# Altium PCB CellVoltageControl.PcbDoc (part 1 of 3)
Units mm, origin at the board's own origin, x right, y up, seen from the top; angles counter-clockwise.
Board outline 100.01 x 50.02 mm, 2 copper layers (Top Layer, Bottom Layer); 246 components, 111 nets, 654 pads, 146 vias.
Unrouted connection lines stored in the file: 464.
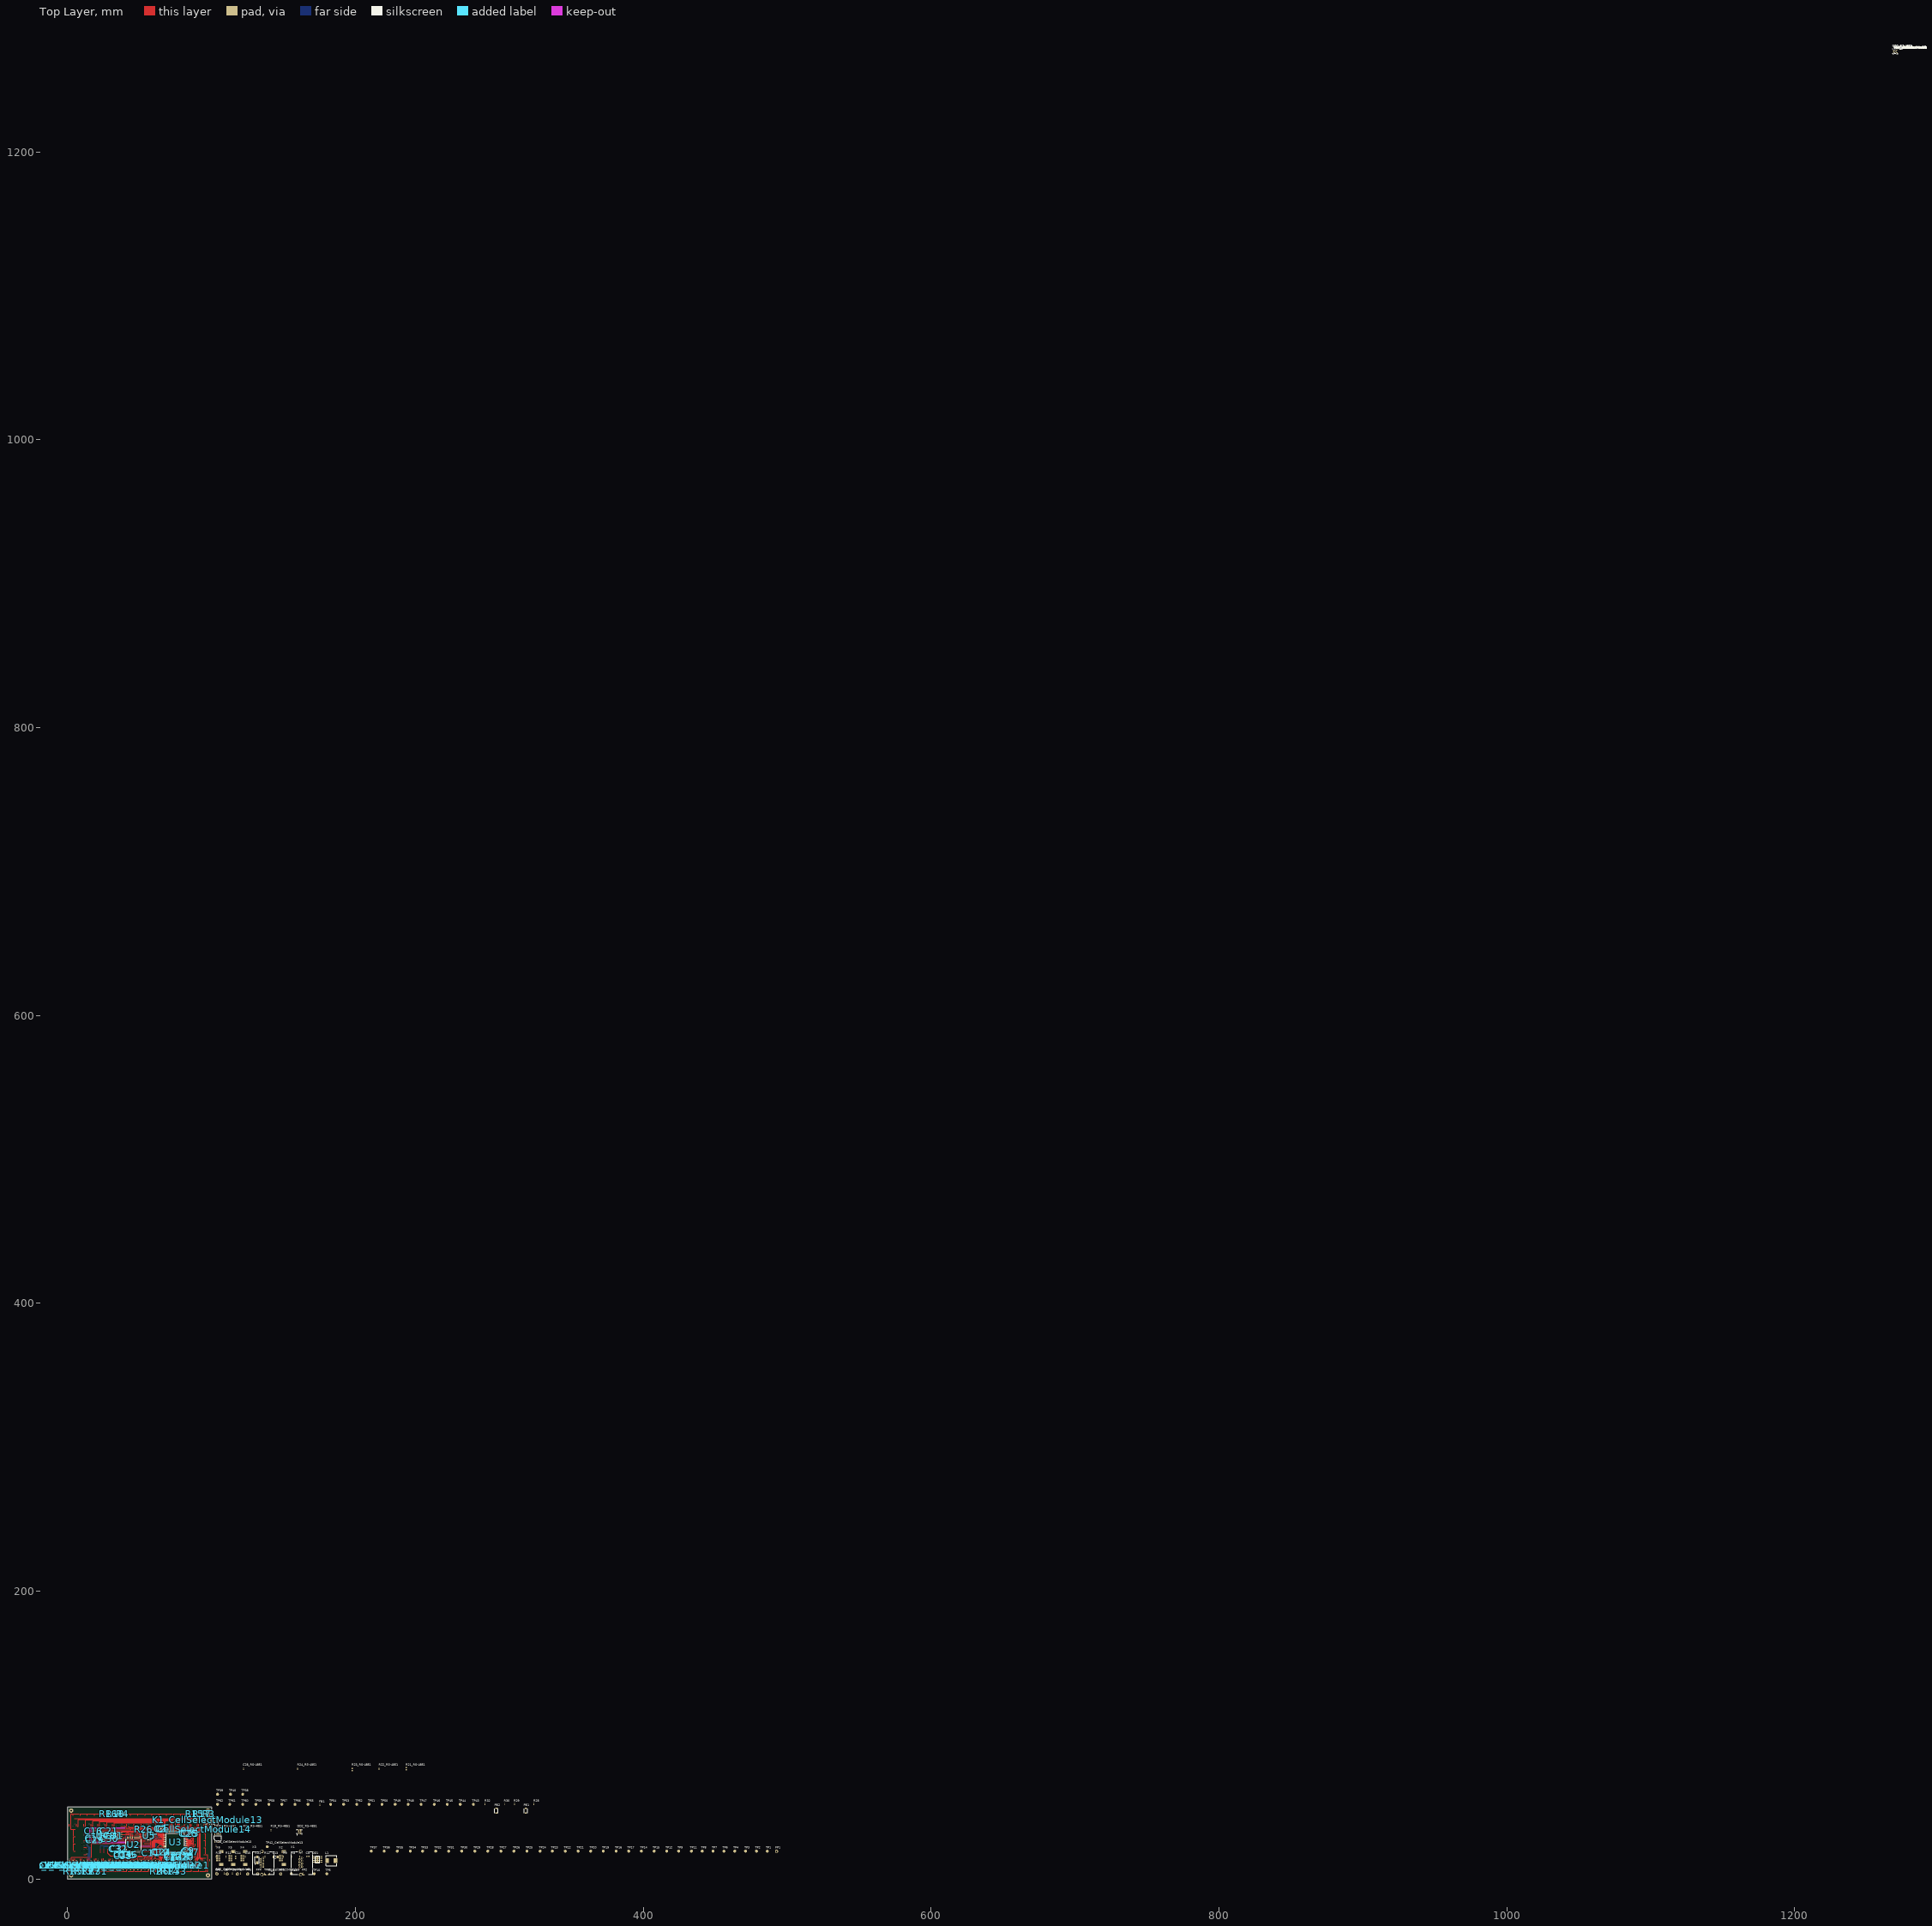
[diagram p0: Top Layer view]
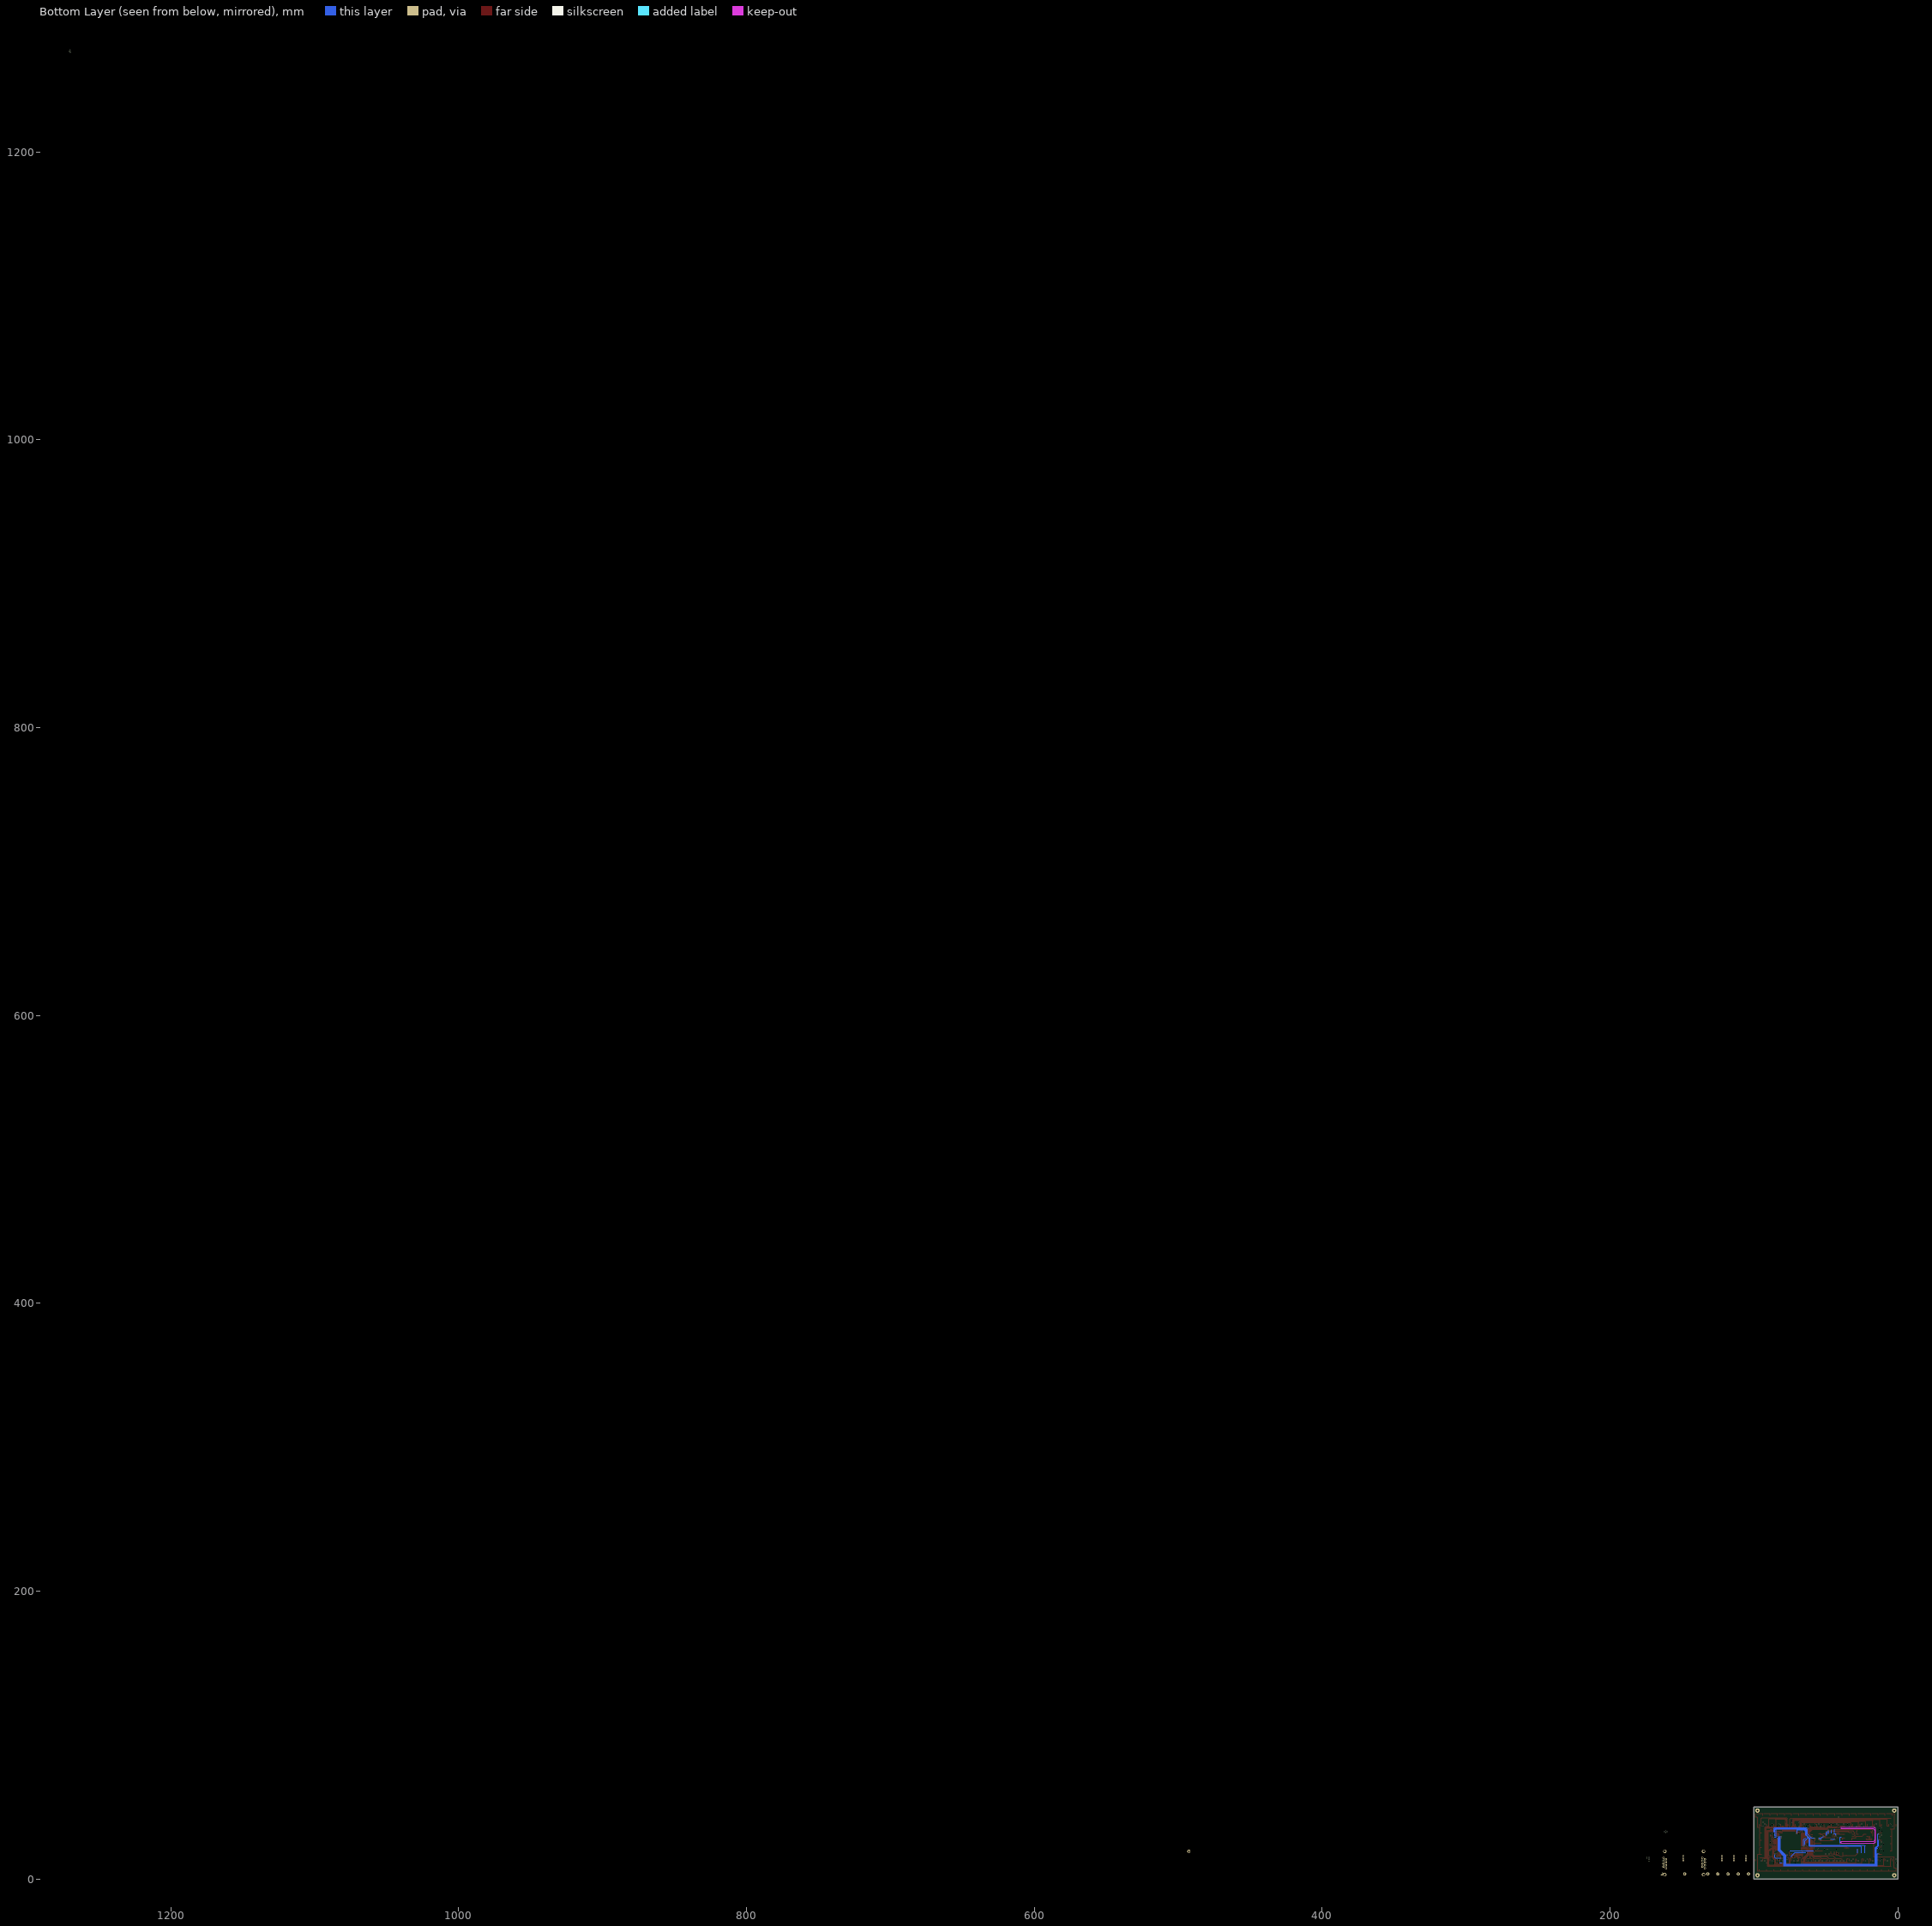
[diagram p1: Bottom Layer view, seen from below]

## Layer stack, top to bottom
Top Solder: solder mask 0.0102, Solder Resist, Dk 3.5
Top Layer: signal copper 0.0356
Dielectric 1: dielectric 0.32, FR-4, Dk 4.8
Bottom Layer: signal copper 0.0356
Bottom Solder: solder mask 0.0102, Solder Resist, Dk 3.5

## Board outline
0,0 100.015,0 100.015,50.021 0,50.021
cut-out: 15.367,26.289 15.367,34.417 cw(c16.637,34.417) 16.637,35.687 39.243,35.687 cw(c39.243,35.306) 39.624,35.306 cw(c39.243,35.306) 39.243,34.925 17.399,34.925 ccw(c17.399,33.655) 16.129,33.655 16.129,27.051 ccw(c17.399,27.051) 17.399,25.781 39.37,25.781 cw(c39.37,25.4) 39.751,25.4 cw(c39.37,25.4) 39.37,25.019 16.637,25.019 cw(c16.637,26.289)

## Design rules (kind name [scope] priority, off if disabled: settings)
BoardOutlineClearance [All] p1: gap=0.254 ignorepadtopadclearanceinfootprint=FALSE except(0: Arc-SplitContinuation Track-SplitContinuation SMDPad-SplitContinuation THPad-SplitContinuation Via-SplitContinuation Fill-SplitContinuation Poly-SplitContinuation Region-SplitContinuation Text-SplitContinuation)
Clearance [All] p1: gap=0.254 ignorepadtopadclearanceinfootprint=TRUE except(0: Arc-Hole Track-Hole SMDPad-Hole THPad-Hole Via-Hole Fill-Hole Poly-Hole Region-Hole Text-Hole)
ComponentClearance [All] p1: gap=0 collisioncheckmode=3 verticalgap=0.254 showdistances=FALSE
PolygonConnect [All] p1: connectstyle=Relief reliefconductorwidth=0.254 reliefentries=4 polygonreliefangle="90 Angle" airgapwidth=0.254
RoutingVias [All] p1: holewidth=0.305 width=0.61 viastyle="Through Hole" minholewidth=0.3 minwidth=0.6 maxholewidth=1.27 maxwidth=2.54
SolderMaskExpansion [All] p1: expansion=0.102 istentingtop=FALSE
SupplyNets "Schematic Supply Nets_6" [InNet('24V')] p1: voltage=0.000
SupplyNets "Schematic Supply Nets_5" [InNet('3V3')] p2: voltage=0.000
SupplyNets "Schematic Supply Nets_4" [InNet('5V')] p3: voltage=0.000
SupplyNets "Schematic Supply Nets_2" [InNet('ISO_GND')] p4: voltage=0.000
SupplyNets "Schematic Supply Nets_1" [InNet('GND')] p5: voltage=0.000
SupplyNets "Schematic Supply Nets" [InNet('ISO_5V')] p6: voltage=0.000
Width [All] p1: maxlimit=12.5 minlimit=0.2 preferedwidth=0.2
29 further rules are at their usual default settings.

## Classes and differential pairs
channel class RS-485_SN65HVD72DRBR: RS-4851 RS-4852 RS-4853
channel class Opto_AQY280SX: CellSelectModule1 CellSelectModule2 CellSelectModule3 CellSelectModule4 CellSelectModule5 CellSelectModule6 CellSelectModule7 CellSelectModule8 CellSelectModule9 CellSelectModule10 CellSelectModule11 CellSelectModule12 CellSelectModule13 CellSelectModule14
component class RS-4853: C28_RS-4853 DD2_RS-4853 R19_RS-4853 R20_RS-4853 R21_RS-4853 R22_RS-4853 R23_RS-4853 R24_RS-4853 VD2_RS-4853
component class RS-4852: C28_RS-4852 DD2_RS-4852 R19_RS-4852 R20_RS-4852 R21_RS-4852 R22_RS-4852 R23_RS-4852 R24_RS-4852 VD2_RS-4852
component class RS-4851: C28_RS-4851 DD2_RS-4851 R19_RS-4851 R20_RS-4851 R21_RS-4851 R22_RS-4851 R23_RS-4851 R24_RS-4851 VD2_RS-4851
component class LDO_3V3: C8 C9 C10 C11 C12 C13 C14 C15 DD1 L1 R7 R8 R9 R10 R11 R12 VD1
component class CellVoltageControl: C1 C2 FP1 FP2 FP3 FP4 FP5 FP6 FP7 FP8 R1 R2 R3 R4 R5 R6 TP2 TP4 TP6 TP7 TP9 X1 X2 X3 X4 X5 X6
component class ISO_I2C: C16 C17 D2 R13 R14 R15 R16
component class ISO_5V: C18 C19 C20 C21 R17 R18 U2
component class CellSelectModule6: K1_CellSelectModule6 R26_CellSelectModule6 TP42_CellSelectModule6
component class ADC: C3 U1
component class CellSelectModule10: K1_CellSelectModule10 R26_CellSelectModule10 TP42_CellSelectModule10
component class MCU: C29 C30 C31 C32 C33 C34 C35 C36 FB1 PB1 PB2 R27 R31 R33 TP43 TP45 TP47 TP49 TP51 TP53 TP55 TP57 TP59 TP61 TP62 U5 Y1 Y2
component class Vref-2v5: C22 C23 C24 C25 C26 C27 TP38 TP39 TP40 U3 U4
component class CellSelectModule14: K1_CellSelectModule14 R26_CellSelectModule14 TP42_CellSelectModule14
component class CellSelectModule13: K1_CellSelectModule13 R26_CellSelectModule13 TP42_CellSelectModule13
component class CellSelectModule12: K1_CellSelectModule12 R26_CellSelectModule12 TP42_CellSelectModule12
component class CellSelectModule11: K1_CellSelectModule11 R26_CellSelectModule11 TP42_CellSelectModule11
component class CellSelectModule9: K1_CellSelectModule9 R26_CellSelectModule9 TP42_CellSelectModule9
component class CellSelectModule7: K1_CellSelectModule7 R26_CellSelectModule7 TP42_CellSelectModule7
component class CellSelectModule8: K1_CellSelectModule8 R26_CellSelectModule8 TP42_CellSelectModule8
component class CellSelectModule5: K1_CellSelectModule5 R26_CellSelectModule5 TP42_CellSelectModule5
component class CellSelectModule4: K1_CellSelectModule4 R26_CellSelectModule4 TP42_CellSelectModule4
component class CellSelectModule3: K1_CellSelectModule3 R26_CellSelectModule3 TP42_CellSelectModule3
component class CellSelectModule2: K1_CellSelectModule2 R26_CellSelectModule2 TP42_CellSelectModule2
component class CellSelectModule1: K1_CellSelectModule1 R26_CellSelectModule1 TP42_CellSelectModule1

## Components (designator, comment, footprint, x,y, rotation, side; value= is the part's Value field where it differs from the comment)
C1 "1nF" CAP-1206(3216)X125T20 65.765,34.744 r90 top
C2 "1nF" CAP-1206(3216)X125T20 64.567,34.889 r270 top
C3 "0.1uF" C_CERAMIC_0402_MED 29.346,29.887 r270 top
C4 "1uF" C_CERAMIC_0402_MED 103.251,3.81 r90 top
C5 "0.1uF" C_CERAMIC_0402_MED 108.839,3.81 r90 top
C6 "0.1uF" C_CERAMIC_0402_MED 114.554,3.81 r90 top
C7 "1uF" C_CERAMIC_0402_MED 120.142,3.81 r90 top
C8 "0.1uF" C_CERAMIC_0603_MED 166.878,15.621 r0 top
C9 "10uF" CAP-1206(3216)X85T15 84.003,19.408 r270 top
C10 "10uF" CAP-1206(3216)X85T15 64.589,18.669 r270 top
C11 "10uF" CAP-1206(3216)X85T15 58.166,18.161 r270 top
C12 "100uF" C_CERAMIC_1206_MED 78.613,16.285 r180 top
C13 "100uF" C_CERAMIC_1206_MED 144.526,15.24 r0 top
C14 "1.5nF" C_CERAMIC_0603_MED 116.84,14.859 r90 top
C15 "10pF" C_CERAMIC_0402_MED 123.444,15.494 r90 top
C16 "0.1uF" C_CERAMIC_0402_MED 17.971,33.401 r0 top
C17 "10uF" C_CERAMIC_0402_MED 18.733,28.143 r0 top
C18 "10uF" C_CERAMIC_0402_MED 78.486,15.09 r180 top
C19 "0.1uF" C_CERAMIC_0402_MED 81.445,16.248 r0 top
C20 "0.1uF" C_CERAMIC_0402_MED 81.629,15.172 r0 top
C21 "10uF" C_CERAMIC_0402_MED 28.975,33.305 r0 top
C22 "0.1uF" C_CERAMIC_0402_MED 73.58,16.368 r180 top
C23 "10uF" C_CERAMIC_0402_MED 73.533,15.092 r0 top
C24 "4.7uF" C_CERAMIC_0402_MED 65.786,18.593 r90 top
C25 "0.1uF" C_CERAMIC_0402_MED 85.271,31.369 r90 top
C26 "10uF" C_CERAMIC_0402_MED 84.074,31.369 r270 top
C27 "0.1uF" C_CERAMIC_0402_MED 85.2,18.674 r90 top
C28_RS-4851 "0.1uF" C_CERAMIC_0402_MED 122.174,76.581 r90 top (schematic designator C28)
C28_RS-4852 "0.1uF" C_CERAMIC_0402_MED 1269.987,1269.987 r0 top (schematic designator C28)
C28_RS-4853 "0.1uF" C_CERAMIC_0402_MED 1269.987,1269.987 r0 top (schematic designator C28)
C29 "0.1uF" C_CERAMIC_0402_HI 18.86,27 r180 top
C30 "0.1uF" C_CERAMIC_0402_HI 29.274,28.017 r270 top
C31 "0.1uF" C_CERAMIC_0402_HI 36.068,20.955 r270 top
C32 "10uF" C_CERAMIC_0402_HI 35.181,20.737 r270 top
C33 "0.1uF" C_CERAMIC_0402_HI 38.649,15.989 r0 top
C34 "10uF" C_CERAMIC_0402_HI 38.572,17.131 r0 top
C35 "10nF" C_CERAMIC_0402_HI 41.529,16.637 r270 top
C36 "0.1uF" C_CERAMIC_0402_HI 42.672,16.764 r270 top
D1 "NCV551SN33T1G" TSOT-23-5 103.124,38.608 r0 top
D2 "ISO1540DR" SOIC-8_W3.9MM 104.267,28.448 r0 top
DD1 "TPS54360BDDAR" SOIC127P620X170_HS-9N 173.609,13.589 r0 top
DD2_RS-4851 "SN65HVD72DRBR" TI-SON8-65P300X100_HS 161.163,32.766 r90 top (schematic designator DD2)
DD2_RS-4852 "SN65HVD72DRBR" TI-SON8-65P300X100_HS 1269.987,1269.987 r0 top (schematic designator DD2)
DD2_RS-4853 "SN65HVD72DRBR" TI-SON8-65P300X100_HS 1269.987,1269.987 r0 top (schematic designator DD2)
FB1 "BLM15AX102SN1D" BLM15xxxxxSN1x_MED 175.133,51.308 r90 top value="1 kOhms @ 100MHz"
FP1 "PAD-1.1mm" PAD-1.1mm 492.633,19.177 r0 top
FP2 "PAD-1.1mm" PAD-1.1mm 163.957,3.429 r90 top
FP3 "PAD-1.1mm" PAD-1.1mm 148.082,3.429 r90 top
FP4 "PAD-1.1mm" PAD-1.1mm 132.08,3.429 r90 top
FP5 "PAD-1.1mm" PAD-1.1mm 125.095,3.429 r90 top
FP6 "PAD-1.1mm" PAD-1.1mm 117.983,3.429 r90 top
FP7 "PAD-1.1mm" PAD-1.1mm 110.871,3.429 r90 top
FP8 "PAD-1.1mm" PAD-1.1mm 103.759,3.429 r90 top
K1_CellSelectModule1 "AQY280SX" FP-AQY280SX-MFG 62.45,9.444 r270 top (schematic designator K1)
K1_CellSelectModule2 "AQY280SX" FP-AQY280SX-MFG 57.45,9.444 r270 top (schematic designator K1)
K1_CellSelectModule3 "AQY280SX" FP-AQY280SX-MFG 52.45,9.444 r270 top (schematic designator K1)
K1_CellSelectModule4 "AQY280SX" FP-AQY280SX-MFG 47.45,9.444 r270 top (schematic designator K1)
K1_CellSelectModule5 "AQY280SX" FP-AQY280SX-MFG 42.45,9.444 r270 top (schematic designator K1)
K1_CellSelectModule6 "AQY280SX" FP-AQY280SX-MFG 37.45,9.444 r270 top (schematic designator K1)
K1_CellSelectModule7 "AQY280SX" FP-AQY280SX-MFG 32.45,9.444 r270 top (schematic designator K1)
K1_CellSelectModule8 "AQY280SX" FP-AQY280SX-MFG 27.45,9.444 r270 top (schematic designator K1)
K1_CellSelectModule9 "AQY280SX" FP-AQY280SX-MFG 22.45,9.444 r270 top (schematic designator K1)
K1_CellSelectModule10 "AQY280SX" FP-AQY280SX-MFG 17.45,9.444 r270 top (schematic designator K1)
K1_CellSelectModule11 "AQY280SX" FP-AQY280SX-MFG 12.45,9.444 r270 top (schematic designator K1)
K1_CellSelectModule12 "AQY280SX" FP-AQY280SX-MFG 7.45,9.444 r270 top (schematic designator K1)
K1_CellSelectModule13 "AQY280SX" FP-AQY280SX-MFG 97.45,41.021 r90 top (schematic designator K1)
K1_CellSelectModule14 "AQY280SX" FP-AQY280SX-MFG 2.45,9.444 r270 top (schematic designator K1)
L1 "33uH" SRP7028A-Series 183.261,12.7 r0 top
PB1 "DS1042-24-2017VBR16005" DS1042-24-2017VB 318.389,47.371 r90 top
PB2 "DS1042-24-2017VBR16005" DS1042-24-2017VB 297.942,47.371 r90 top
R1 "120" R_ANY_CHIP_0402_HI 1.495,5.25 r180 top
R2 "120" R_ANY_CHIP_0402_HI 61.5,5.255 r180 top
R3 "1M" CHV1206-Series 98.395,45.15 r0 top
R4 "1M" CHV1206-Series 38.395,45.15 r0 top
R5 "1k" R_ANY_CHIP_0402_MED 6.495,5.25 r180 top
R6 "1k" R_ANY_CHIP_0402_MED 66.5,5.255 r180 top
R7 "22k" R_ANY_CHIP_0402_MED 161.163,15.494 r90 top
R8 "160k" R_ANY_CHIP_0402_MED 155.575,15.494 r90 top
R9 "68k" R_ANY_CHIP_0402_MED 149.86,15.494 r90 top
R10 "2.2k" R_ANY_CHIP_0402_MED 103.124,15.494 r90 top
R11 "160k" R_ANY_CHIP_0402_MED 110.109,15.494 r90 top
R12 "30k" R_ANY_CHIP_0402_MED 137.033,15.494 r90 top
R13 "4.7k" R_ANY_CHIP_0402_MED 11.495,5.25 r180 top
R14 "4.7k" R_ANY_CHIP_0402_MED 71.5,5.255 r180 top
R15 "4.7k" R_ANY_CHIP_0402_MED 88.395,45.15 r0 top
R16 "4.7k" R_ANY_CHIP_0402_MED 28.395,45.15 r0 top
R17 "100k" R_ANY_CHIP_0402_HI 93.395,45.15 r0 top
R18 "100k" R_ANY_CHIP_0402_HI 33.395,45.15 r0 top
R19_RS-4851 "10k" R_ANY_CHIP_0402_MED 141.224,33.909 r90 top (schematic designator R19)
R19_RS-4852 "10k" R_ANY_CHIP_0402_MED 1269.987,1269.987 r0 top (schematic designator R19)
R19_RS-4853 "10k" R_ANY_CHIP_0402_MED 1269.987,1269.987 r0 top (schematic designator R19)
R20_RS-4851 "10k" R_ANY_CHIP_0402_MED 122.301,33.909 r90 top (schematic designator R20)
R20_RS-4852 "10k" R_ANY_CHIP_0402_MED 1269.987,1269.987 r0 top (schematic designator R20)
R20_RS-4853 "10k" R_ANY_CHIP_0402_MED 1269.987,1269.987 r0 top (schematic designator R20)
R21_RS-4851 "10" R_ANY_CHIP_0603_MED 235.331,76.581 r90 top (schematic designator R21)
R21_RS-4852 "10" R_ANY_CHIP_0603_MED 1269.987,1269.987 r0 top (schematic designator R21)
R21_RS-4853 "10" R_ANY_CHIP_0603_MED 1269.987,1269.987 r0 top (schematic designator R21)
R22_RS-4851 "10k" R_ANY_CHIP_0402_MED 216.408,76.581 r90 top (schematic designator R22)
R22_RS-4852 "10k" R_ANY_CHIP_0402_MED 1269.987,1269.987 r0 top (schematic designator R22)
R22_RS-4853 "10k" R_ANY_CHIP_0402_MED 1269.987,1269.987 r0 top (schematic designator R22)
R23_RS-4851 "10" R_ANY_CHIP_0603_MED 197.866,76.073 r90 top (schematic designator R23)
R23_RS-4852 "10" R_ANY_CHIP_0603_MED 1269.987,1269.987 r0 top (schematic designator R23)
R23_RS-4853 "10" R_ANY_CHIP_0603_MED 1269.987,1269.987 r0 top (schematic designator R23)
R24_RS-4851 "10k" R_ANY_CHIP_0402_MED 159.766,76.581 r90 top (schematic designator R24)
R24_RS-4852 "10k" R_ANY_CHIP_0402_MED 1269.987,1269.987 r0 top (schematic designator R24)
R24_RS-4853 "10k" R_ANY_CHIP_0402_MED 1269.987,1269.987 r0 top (schematic designator R24)
R25_CellSelectModule1 "1k" R_ANY_CHIP_0402_MED 1269.987,1269.987 r0 top (schematic designator R25)
R25_CellSelectModule2 "1k" R_ANY_CHIP_0402_MED 1269.987,1269.987 r0 top (schematic designator R25)
R25_CellSelectModule3 "1k" R_ANY_CHIP_0402_MED 1269.987,1269.987 r0 top (schematic designator R25)
R25_CellSelectModule4 "1k" R_ANY_CHIP_0402_MED 1269.987,1269.987 r0 top (schematic designator R25)
R25_CellSelectModule5 "1k" R_ANY_CHIP_0402_MED 1269.987,1269.987 r0 top (schematic designator R25)
R25_CellSelectModule6 "1k" R_ANY_CHIP_0402_MED 1269.987,1269.987 r0 top (schematic designator R25)
R25_CellSelectModule7 "1k" R_ANY_CHIP_0402_MED 1269.987,1269.987 r0 top (schematic designator R25)
R25_CellSelectModule8 "1k" R_ANY_CHIP_0402_MED 103.124,3.937 r90 top (schematic designator R25)
R25_CellSelectModule9 "1k" R_ANY_CHIP_0402_MED 1269.987,1269.987 r0 top (schematic designator R25)
R25_CellSelectModule10 "1k" R_ANY_CHIP_0402_MED 1269.987,1269.987 r0 top (schematic designator R25)
R25_CellSelectModule11 "1k" R_ANY_CHIP_0402_MED 1269.987,1269.987 r0 top (schematic designator R25)
R25_CellSelectModule12 "1k" R_ANY_CHIP_0402_MED 1269.987,1269.987 r0 top (schematic designator R25)
R25_CellSelectModule13 "1k" R_ANY_CHIP_0402_MED 1269.987,1269.987 r0 top (schematic designator R25)
R25_CellSelectModule14 "1k" R_ANY_CHIP_0402_MED 1269.987,1269.987 r0 top (schematic designator R25)
R26_CellSelectModule1 "430" R_ANY_CHIP_0402_MED 1269.987,1269.987 r0 top (schematic designator R26)
R26_CellSelectModule2 "430" R_ANY_CHIP_0402_MED 1269.987,1269.987 r0 top (schematic designator R26)
R26_CellSelectModule3 "430" R_ANY_CHIP_0402_MED 1269.987,1269.987 r0 top (schematic designator R26)
R26_CellSelectModule4 "430" R_ANY_CHIP_0402_MED 1269.987,1269.987 r0 top (schematic designator R26)
R26_CellSelectModule5 "430" R_ANY_CHIP_0402_MED 1269.987,1269.987 r0 top (schematic designator R26)
R26_CellSelectModule6 "430" R_ANY_CHIP_0402_MED 1269.987,1269.987 r0 top (schematic designator R26)
R26_CellSelectModule7 "430" R_ANY_CHIP_0402_MED 1269.987,1269.987 r0 top (schematic designator R26)
R26_CellSelectModule8 "430" R_ANY_CHIP_0402_MED 1269.987,1269.987 r0 top (schematic designator R26)
R26_CellSelectModule9 "430" R_ANY_CHIP_0402_MED 1269.987,1269.987 r0 top (schematic designator R26)
R26_CellSelectModule10 "430" R_ANY_CHIP_0402_MED 1269.987,1269.987 r0 top (schematic designator R26)
R26_CellSelectModule11 "430" R_ANY_CHIP_0402_MED 1269.987,1269.987 r0 top (schematic designator R26)
R26_CellSelectModule12 "430" R_ANY_CHIP_0402_MED 1269.987,1269.987 r0 top (schematic designator R26)
R26_CellSelectModule13 "430" R_ANY_CHIP_0402_MED 103.124,22.86 r90 top (schematic designator R26)
R26_CellSelectModule14 "430" R_ANY_CHIP_0402_MED 86.897,34.325 r0 top (schematic designator R26)
R27 "10k" R_ANY_CHIP_0402_MED 16.5,5.255 r180 top
R28 "0" R_ANY_CHIP_0402_MED 323.977,51.943 r90 top
R29 "0" R_ANY_CHIP_0402_MED 310.388,51.943 r90 top
R30 "0" R_ANY_CHIP_0402_MED 303.53,51.943 r90 top
R31 "10k" R_ANY_CHIP_0402_MED 21.5,5.255 r180 top
R32 "0" R_ANY_CHIP_0402_MED 289.941,51.943 r90 top
R33 "0" R_ANY_CHIP_0402_MED 76.505,5.26 r180 top
TP1 "LED_LINK" TP_SMD_2mm 486.156,19.304 r90 top
TP2 "LED_LINK" TP_SMD_2mm 478.663,19.304 r90 top
TP3 "LED_LINK" TP_SMD_2mm 471.043,19.304 r90 top
TP4 "LED_LINK" TP_SMD_2mm 463.55,19.304 r90 top
TP5 "LED_LINK" TP_SMD_2mm 180.086,3.556 r90 top
TP6 "LED_LINK" TP_SMD_2mm 456.057,19.304 r90 top
TP7 "LED_LINK" TP_SMD_2mm 448.437,19.304 r90 top
TP8 "LED_LINK" TP_SMD_2mm 440.944,19.304 r90 top
TP9 "LED_LINK" TP_SMD_2mm 424.561,19.304 r90 top
TP10 "LED_LINK" TP_SMD_2mm 171.323,3.556 r90 top
TP11 "LED_LINK" TP_SMD_2mm 433.451,19.304 r90 top
TP12 "LED_LINK" TP_SMD_2mm 416.306,19.304 r90 top
TP13 "LED_LINK" TP_SMD_2mm 155.448,3.556 r90 top
TP14 "LED_LINK" TP_SMD_2mm 398.653,19.304 r90 top
TP15 "LED_LINK" TP_SMD_2mm 407.543,19.304 r90 top
TP16 "LED_LINK" TP_SMD_2mm 381.127,19.304 r90 top
TP17 "LED_LINK" TP_SMD_2mm 389.89,19.304 r90 top
TP18 "LED_LINK" TP_SMD_2mm 139.573,3.556 r90 top
TP19 "LED_LINK" TP_SMD_2mm 372.237,19.304 r90 top
TP20 "LED_LINK" TP_SMD_2mm 363.474,19.304 r90 top
TP21 "LED_LINK" TP_SMD_2mm 354.711,19.304 r90 top
TP22 "LED_LINK" TP_SMD_2mm 345.821,19.304 r90 top
TP23 "LED_LINK" TP_SMD_2mm 336.804,19.304 r90 top
TP24 "LED_LINK" TP_SMD_2mm 328.295,19.304 r90 top
TP25 "LED_LINK" TP_SMD_2mm 319.151,19.304 r90 top
TP26 "LED_LINK" TP_SMD_2mm 310.134,19.304 r90 top
TP27 "LED_LINK" TP_SMD_2mm 301.117,19.304 r90 top
TP28 "LED_LINK" TP_SMD_2mm 291.973,19.304 r90 top
TP29 "LED_LINK" TP_SMD_2mm 282.956,19.304 r90 top
TP30 "LED_LINK" TP_SMD_2mm 273.812,19.304 r90 top
TP31 "LED_LINK" TP_SMD_2mm 264.795,19.304 r90 top
TP32 "LED_LINK" TP_SMD_2mm 255.778,19.304 r90 top
TP33 "LED_LINK" TP_SMD_2mm 246.634,19.304 r90 top
TP34 "LED_LINK" TP_SMD_2mm 238.125,19.304 r90 top
TP35 "LED_LINK" TP_SMD_2mm 229.108,19.304 r90 top
TP36 "LED_LINK" TP_SMD_2mm 219.964,19.304 r90 top
TP37 "LED_LINK" TP_SMD_2mm 210.947,19.304 r90 top
TP38 "LED_LINK" TP_SMD_2mm 121.666,58.801 r90 top
TP39 "LED_LINK" TP_SMD_2mm 104.14,58.801 r90 top
TP40 "LED_LINK" TP_SMD_2mm 113.157,58.801 r90 top
TP41_CellSelectModule1 "LED_LINK" TP_SMD_2mm 1269.987,1269.987 r0 top (schematic designator TP41)
TP41_CellSelectModule2 "LED_LINK" TP_SMD_2mm 1269.987,1269.987 r0 top (schematic designator TP41)
TP41_CellSelectModule3 "LED_LINK" TP_SMD_2mm 1269.987,1269.987 r0 top (schematic designator TP41)
TP41_CellSelectModule4 "LED_LINK" TP_SMD_2mm 1269.987,1269.987 r0 top (schematic designator TP41)
TP41_CellSelectModule5 "LED_LINK" TP_SMD_2mm 1269.987,1269.987 r0 top (schematic designator TP41)
TP41_CellSelectModule6 "LED_LINK" TP_SMD_2mm 1269.987,1269.987 r0 top (schematic designator TP41)
TP41_CellSelectModule7 "LED_LINK" TP_SMD_2mm 1269.987,1269.987 r0 top (schematic designator TP41)
TP41_CellSelectModule8 "LED_LINK" TP_SMD_2mm 137.414,3.429 r90 top (schematic designator TP41)
TP41_CellSelectModule9 "LED_LINK" TP_SMD_2mm 1269.987,1269.987 r0 top (schematic designator TP41)
TP41_CellSelectModule10 "LED_LINK" TP_SMD_2mm 1269.987,1269.987 r0 top (schematic designator TP41)
TP41_CellSelectModule11 "LED_LINK" TP_SMD_2mm 1269.987,1269.987 r0 top (schematic designator TP41)
TP41_CellSelectModule12 "LED_LINK" TP_SMD_2mm 1269.987,1269.987 r0 top (schematic designator TP41)
TP41_CellSelectModule13 "LED_LINK" TP_SMD_2mm 1269.987,1269.987 r0 top (schematic designator TP41)
TP41_CellSelectModule14 "LED_LINK" TP_SMD_2mm 1269.987,1269.987 r0 top (schematic designator TP41)
TP42_CellSelectModule1 "LED_LINK" TP_SMD_2mm 1269.987,1269.987 r0 top (schematic designator TP42)
TP42_CellSelectModule2 "LED_LINK" TP_SMD_2mm 1269.987,1269.987 r0 top (schematic designator TP42)
TP42_CellSelectModule3 "LED_LINK" TP_SMD_2mm 1269.987,1269.987 r0 top (schematic designator TP42)
TP42_CellSelectModule4 "LED_LINK" TP_SMD_2mm 1269.987,1269.987 r0 top (schematic designator TP42)
TP42_CellSelectModule5 "LED_LINK" TP_SMD_2mm 1269.987,1269.987 r0 top (schematic designator TP42)
TP42_CellSelectModule6 "LED_LINK" TP_SMD_2mm 1269.987,1269.987 r0 top (schematic designator TP42)
TP42_CellSelectModule7 "LED_LINK" TP_SMD_2mm 1269.987,1269.987 r0 top (schematic designator TP42)
TP42_CellSelectModule8 "LED_LINK" TP_SMD_2mm 1269.987,1269.987 r0 top (schematic designator TP42)
TP42_CellSelectModule9 "LED_LINK" TP_SMD_2mm 1269.987,1269.987 r0 top (schematic designator TP42)
TP42_CellSelectModule10 "LED_LINK" TP_SMD_2mm 1269.987,1269.987 r0 top (schematic designator TP42)
TP42_CellSelectModule11 "LED_LINK" TP_SMD_2mm 1269.987,1269.987 r0 top (schematic designator TP42)
TP42_CellSelectModule12 "LED_LINK" TP_SMD_2mm 1269.987,1269.987 r0 top (schematic designator TP42)
TP42_CellSelectModule13 "LED_LINK" TP_SMD_2mm 138.684,22.352 r90 top (schematic designator TP42)
TP42_CellSelectModule14 "LED_LINK" TP_SMD_2mm 1269.987,1269.987 r0 top (schematic designator TP42)
TP43 "LED_LINK" TP_SMD_2mm 281.94,51.816 r90 top
TP44 "LED_LINK" TP_SMD_2mm 272.796,51.816 r90 top
TP45 "LED_LINK" TP_SMD_2mm 263.779,51.816 r90 top
TP46 "LED_LINK" TP_SMD_2mm 254.762,51.816 r90 top
TP47 "LED_LINK" TP_SMD_2mm 245.618,51.816 r90 top
TP48 "LED_LINK" TP_SMD_2mm 236.601,51.816 r90 top
TP49 "LED_LINK" TP_SMD_2mm 227.584,51.816 r90 top
TP50 "LED_LINK" TP_SMD_2mm 218.44,51.816 r90 top
TP51 "LED_LINK" TP_SMD_2mm 209.423,51.816 r90 top
TP52 "LED_LINK" TP_SMD_2mm 200.914,51.816 r90 top
TP53 "LED_LINK" TP_SMD_2mm 191.77,51.816 r90 top
TP54 "LED_LINK" TP_SMD_2mm 182.753,51.816 r90 top
TP55 "LED_LINK" TP_SMD_2mm 167.005,51.816 r90 top
TP56 "LED_LINK" TP_SMD_2mm 157.988,51.816 r90 top
TP57 "LED_LINK" TP_SMD_2mm 148.844,51.816 r90 top
TP58 "LED_LINK" TP_SMD_2mm 139.827,51.816 r90 top
TP59 "LED_LINK" TP_SMD_2mm 130.81,51.816 r90 top
TP60 "LED_LINK" TP_SMD_2mm 121.666,51.816 r90 top
TP61 "LED_LINK" TP_SMD_2mm 112.649,51.816 r90 top
TP62 "LED_LINK" TP_SMD_2mm 104.14,51.816 r90 top
U1 "ADS1252U" TI-D8_M 34.31,30.099 r180 top
U2 "UCC12040DVER" FP-DVE0016A-MFG 45.824,23.749 r90 top
U3 "OPA350UA" STM-LQFP100_L 74.93,25.432 r90 top
U4 "LM4132AMF-2.5/NOPB" D0008A_M 24.431,30.099 r0 top
U5 "STM32L010K4T6" FP-D0008A-MFG 56.549,29.909 r180 top
VD1 "SK56A-LTP" SMA_MED 131.699,13.208 r90 top
VD2_RS-4851 "SM712.TCT" SOT-23_MED 104.775,32.893 r90 top (schematic designator VD2)
VD2_RS-4852 "SM712.TCT" SOT-23_MED 1269.987,1269.987 r0 top (schematic designator VD2)
VD2_RS-4853 "SM712.TCT" SOT-23_MED 1269.987,1269.987 r0 top (schematic designator VD2)
X1 "43860-0004" 43860-0004 162.814,11.557 r90 top
X2 "W1359-04PATRI0R" W1359-04PATXI0R_DBG 149.987,14.478 r90 top
X3 "43860-0004" 43860-0004 135.89,11.557 r90 top
X4 "W1359-04PATRI0R" W1359-04PATXI0R_DBG 123.063,14.478 r90 top
X5 "W1359-04PATRI0R" W1359-04PATXI0R_DBG 114.681,14.478 r90 top
X6 "W1359-04PATRI0R" W1359-04PATXI0R_DBG 106.299,14.478 r90 top
Y1 "ECS-TXO-2016-33-160-TR" FP-SIT1552-J-MFG 71.4,14.802 r90 top
Y2 "SIT1552AC-JE-DCC-32.768D" FP-TXO-2016-MFG 76.2,15.056 r90 top

## Footprints (in the part's own frame and the unit in brackets; to place one, negate y for a bottom-side part, rotate by r counter-clockwise, add the part's x,y. Pads: shape width x height; smd on the part's side, far side on the other; paste and mask are expansions set on the pad)
43860-0004 [mm]
  round 1.509 hole 0.97: 1(3.06,0) 2(2.04,1.78) 3(1.02,0) 4(0,1.78) 5(-1.02,0) 6(-2.04,1.78) 7(-3.06,0) 8(-4.08,1.78)
  round 0 hole 3.33 unplated paste-2539.97 mask+0.05: MP(-6.86,-2.54) MP(5.84,-2.54)
  round 2.355 hole 1.57: SH(-8.61,0.89) SH(7.59,0.89)
  silkscreen extent -8.38,-7.62 7.37,7.37, body extent -9.57,-7.85 8.49,7.89, height 14.26
BLM15xxxxxSN1x_MED [mm] "Chip Inductor, 2-Leads, Body 1,00x0,50mm, IPC Medium Density"
  rrect15% 0.59x0.62 smd mask+0.05: 1(-0.455,0) 2(0.455,0)
  body extent -0.52,-0.27 0.53,0.28, height 0.55
C_CERAMIC_0402_HI [mm] "Chip Capacitor, 2-Leads, Body 1,00x0,50mm, IPC High Density"
  rrect15% 0.56x0.52 smd mask+0.05: 1(-0.39,0) 2(0.39,0)
  body extent -0.52,-0.27 0.53,0.28, height 0.55
C_CERAMIC_0402_MED [mm] "Chip Capacitor, 2-Leads, Body 1,00x0,50mm, IPC Medium Density"
  rrect15% 0.62x0.62 smd mask+0.05: 1(-0.44,0) 2(0.44,0)
  body extent -0.52,-0.27 0.53,0.28, height 0.55
C_CERAMIC_0603_MED [mm] "Chip Capacitor, 2-Leads, Body 1,60x0,80mm, IPC Medium Density"
  rrect15% 1x0.95 smd mask+0.05: 1(-0.75,0) 2(0.75,0)
  Top Layer pour cut-out: -0.05,0.45 0.05,0.45 0.05,-0.45 -0.05,-0.45
  body extent -0.9,-0.5 0.9,0.5, height 0.9
C_CERAMIC_1206_MED [mm] "Chip Capacitor, 2-Leads, Body 3,20x1,60mm, IPC Medium Density"
  rrect15% 1.35x1.8 smd mask+0.05: 1(-1.375,0) 2(1.375,0)
  silkscreen extent -0.3,-0.8 0.3,0.8, body extent -1.7,-0.9 1.7,0.9, height 1.8
CAP-1206(3216)X85T15 [mm] "Chip Capacitor, 2-Leads, Body 3,20x1,60mm, IPC Medium Density"
  rrect15% 1.35x1.8 smd mask+0.05: 1(-1.375,0) 2(1.375,0)
  silkscreen extent -0.3,-0.8 0.3,0.8, body extent -1.7,-0.9 1.7,0.9, height 1
CAP-1206(3216)X125T20 [mm] "Chip Capacitor, 2-Leads, Body 3,20x1,60mm, IPC Medium Density"
  rrect15% 1.35x1.8 smd mask+0.05: 1(-1.375,0) 2(1.375,0)
  silkscreen extent -0.3,-0.8 0.3,0.8, body extent -1.7,-0.9 1.7,0.9, height 1.45
CHV1206-Series [mm] "Chip Resistor, 2-Leads, Body 3,10x1,60mm, IPC Medium Density"
  rrect15% 1.3x1.7 smd mask+0.05: 1(-1.7,0) 2(1.7,0)
  silkscreen extent -0.45,-0.75 0.45,0.75, body extent -1.6,-0.85 1.6,0.85, height 0.65
D0008A_M [mm] "SOIC, 8-Leads, Body 5x4mm, Pitch 1.27mm, IPC Low Density"
  rrect15% 1.65x0.65 smd: 1(-2.825,1.905) 2(-2.825,0.635) 3(-2.825,-0.635) 4(-2.825,-1.905) 5(2.825,-1.905) 6(2.825,-0.635) 7(2.825,0.635) 8(2.825,1.905)
  silkscreen extent -1.6,-2.5 1.6,2.5, body extent -3,-2.45 3,2.45, height 1.63
DS1042-24-2017VB [mm]
  rrect15% 0.8x1.7 smd mask+0.05: 1(-1.7,0) 2(1.7,0)
  silkscreen extent -1.5,-1.25 1.5,1.25, body extent -2,-1.25 2,1.25, height 1.6
FP-AQY280SX-MFG [mm]
  rect 1.2x0.8 smd paste+0 mask+0: 1(-3,1.27) 2(-3,-1.27) 3(3,-1.27) 4(3,1.27)
  silkscreen extent -2.3,-2.25 2.3,2.25, body extent -3.7,-2.35 3.7,2.35, height 0.25
FP-D0008A-MFG [mm]
  rrect17% 1.55x0.6 smd paste+0 mask+0: 1(-2.7,1.905) 2(-2.7,0.635) 3(-2.7,-0.635) 4(-2.7,-1.905) 5(2.7,-1.905) 6(2.7,-0.635) 7(2.7,0.635) 8(2.7,1.905)
  silkscreen extent -1.55,-2.5 1.55,2.5, body extent -3.57,-2.75 3.57,2.75, height 0.25
FP-DVE0016A-MFG [mm]
  rrect17% 1.65x0.6 smd paste+0 mask+0: 1(-4.875,4.445) 2(-4.875,3.175) 3(-4.875,1.905) 4(-4.875,0.635) 5(-4.875,-0.635) 6(-4.875,-1.905) 7(-4.875,-3.175) 8(-4.875,-4.445) 9(4.875,-4.445) 10(4.875,-3.175) 11(4.875,-1.905) 12(4.875,-0.635) 13(4.875,0.635) 14(4.875,1.905) 15(4.875,3.175) 16(4.875,4.445)
  silkscreen extent -3.8,-5.25 3.8,5.25, body extent -5.8,-5.5 5.8,5.5, height 0.25
FP-SIT1552-J-MFG [mm]
  round 0.25 smd paste+0 mask-1000: 1(-0.5,-0.205) 2(0.5,-0.205) 3(0.5,0.205) 4(-0.5,0.205)
  silkscreen extent -1.22,-0.51 0.89,0.51, body extent -1.29,-0.94 1.29,0.94, height 0.25
FP-TXO-2016-MFG [mm]
  rect 0.8x0.7 smd paste+0 mask+0: 1(-0.65,-0.5) 2(0.65,-0.5) 3(0.65,0.5) 4(-0.65,0.5)
  silkscreen extent -1.48,-0.59 -1.32,-0.43, body extent -1.15,-0.89 1.15,1.01, height 0.25
PAD-1.1mm [mm]
  round 2.2 hole 1.1: 1(0,0)
R_ANY_CHIP_0402_HI [mm] "Chip Resistor, 2-Leads, Body 1,00x0,50mm, IPC High Density"
  rrect15% 0.5x0.45 smd mask+0.05: 1(-0.375,0) 2(0.375,0)
  body extent -0.52,-0.27 0.53,0.28, height 0.4
R_ANY_CHIP_0402_MED [mm] "Chip Resistor, 2-Leads, Body 1,00x0,50mm, IPC Medium Density"
  rrect15% 0.6x0.55 smd mask+0.05: 1(-0.425,0) 2(0.425,0)
  body extent -0.52,-0.27 0.53,0.28, height 0.4
R_ANY_CHIP_0603_MED [mm] "Chip Resistor, 2-Leads, Body 1,60x0,80mm, IPC Medium Density"
  rrect15% 0.85x0.9 smd mask+0.05: 1(-0.775,0) 2(0.775,0)
  body extent -0.85,-0.45 0.85,0.45, height 0.55
SMA_MED [mm] "Molded Diode, 2-Leads, Body 4,30x2,61mm, IPC Medium Density"
  rrect15% 2x1.9 smd mask+0.05: AN(2.05,0) CA(-2.05,0)
  silkscreen extent -2.97,-1.5 2.3,1.57, body extent -2.52,-1.46 2.52,1.46, height 2.44
SOIC127P620X170_HS-9N [mm] "SOIC, 8-Leads, Body 5,00x4,00mm, Pitch 1,27mm, Thermal Pad 3,10x2,40mm, IPC Medium Density"
  rrect50% 1.55x0.6 smd mask+0.05: 1(-2.8,1.905) 2(-2.8,0.635) 3(-2.8,-0.635) 4(-2.8,-1.905) 5(2.8,-1.905) 6(2.8,-0.635) 7(2.8,0.635) 8(2.8,1.905)
  rrect5% 2.95x4.9 smd paste-1.9 mask-1.9: 9(0,0)
  silkscreen extent -1.6,-2.5 1.6,2.5, body extent -3.1,-2.5 3.1,2.5, height 1.7
SOIC-8_W3.9MM [mm]
  rrect50% 0.6x1.55 smd mask+0.05: 1(-1.905,-2.7) 2(-0.635,-2.7) 3(0.635,-2.7) 4(1.905,-2.7) 5(1.905,2.7) 6(0.635,2.7) 7(-0.635,2.7) 8(-1.905,2.7)
  silkscreen extent -2.5,-1.6 2.5,1.6, body extent -2.5,-3 2.5,3, height 1.75
SOT-23_MED [mm] "SOT23, 3-Leads, Body 2,92x2,37mm, Pitch 0,95mm, IPC Medium Density"
  rrect15% 0.9x0.6 smd mask+0.05: 1(1.1,-0.95) 2(1.1,0.95) 3(-1.1,0)
  silkscreen extent -0.7,-1.5 0.2,1.5, body extent -1.25,-1.5 1.25,1.5, height 1.1
SRP7028A-Series [mm] "Shielded Power Inductor, 2-Leads, Body 7,30x6,60mm, IPC Medium Density"
  rrect5% 2.6x3.5 smd: 1(2.9,0) 2(-2.9,0)
  silkscreen extent -3.79,-3.66 3.8,3.65, body extent -3.8,-3.45 3.8,3.45, height 3
STM-LQFP100_L [mm] "Thin QFP, 100-Leads, Body 14x14mm, Pitch 0.5mm, IPC High Density"
  oval 1.55x0.25 smd: 1(-7.525,6) 2(-7.525,5.5) 3(-7.525,5) 4(-7.525,4.5) 5(-7.525,4) 6(-7.525,3.5) 7(-7.525,3) 8(-7.525,2.5) 9(-7.525,2) 10(-7.525,1.5) 11(-7.525,1) 12(-7.525,0.5) 13(-7.525,0) 14(-7.525,-0.5) 15(-7.525,-1) 16(-7.525,-1.5) 17(-7.525,-2) 18(-7.525,-2.5) 19(-7.525,-3) 20(-7.525,-3.5) 21(-7.525,-4) 22(-7.525,-4.5) 23(-7.525,-5) 24(-7.525,-5.5) 25(-7.525,-6) 51(7.525,-6) 52(7.525,-5.5) 53(7.525,-5) 54(7.525,-4.5) 55(7.525,-4) 56(7.525,-3.5) 57(7.525,-3) 58(7.525,-2.5) 59(7.525,-2) 60(7.525,-1.5) 61(7.525,-1) 62(7.525,-0.5) 63(7.525,0) 64(7.525,0.5) 65(7.525,1) 66(7.525,1.5) 67(7.525,2) 68(7.525,2.5) 69(7.525,3) 70(7.525,3.5) 71(7.525,4) 72(7.525,4.5) 73(7.525,5) 74(7.525,5.5) 75(7.525,6)
  oval 0.25x1.55 smd: 26(-6,-7.525) 27(-5.5,-7.525) 28(-5,-7.525) 29(-4.5,-7.525) 30(-4,-7.525) 31(-3.5,-7.525) 32(-3,-7.525) 33(-2.5,-7.525) 34(-2,-7.525) 35(-1.5,-7.525) 36(-1,-7.525) 37(-0.5,-7.525) 38(0,-7.525) 39(0.5,-7.525) 40(1,-7.525) 41(1.5,-7.525) 42(2,-7.525) 43(2.5,-7.525) 44(3,-7.525) 45(3.5,-7.525) 46(4,-7.525) 47(4.5,-7.525) 48(5,-7.525) 49(5.5,-7.525) 50(6,-7.525) 76(6,7.525) 77(5.5,7.525) 78(5,7.525) 79(4.5,7.525) 80(4,7.525) 81(3.5,7.525) 82(3,7.525) 83(2.5,7.525) 84(2,7.525) 85(1.5,7.525) 86(1,7.525) 87(0.5,7.525) 88(0,7.525) 89(-0.5,7.525) 90(-1,7.525) 91(-1.5,7.525) 92(-2,7.525) 93(-2.5,7.525) 94(-3,7.525) 95(-3.5,7.525) 96(-4,7.525) 97(-4.5,7.525) 98(-5,7.525) 99(-5.5,7.525) 100(-6,7.525)
  silkscreen extent -7.49,-6.35 6.35,7.36, body extent -7,-7 7,7, height 1.6
TI-D8_M [mm] "SOIC, 8-Leads, Body 4.9x3.9mm, Pitch 1.27mm, IPC Low Density"
  oval 2.5x0.7 smd: 1(-2.45,1.905) 2(-2.45,0.635) 3(-2.45,-0.635) 4(-2.45,-1.905) 5(2.45,-1.905) 6(2.45,-0.635) 7(2.45,0.635) 8(2.45,1.905)
  silkscreen extent -0.8,-2.5 0.8,2.5, body extent -2,-2.5 2,2.5, height 1.75
TI-SON8-65P300X100_HS [mm] "SON, 8-Leads, Body 3,00x3,00mm, Pitch 0,65mm, Thermal Pad 2,40x1,65mm, IPC Medium Density"
  rrect15% 0.7x0.35 smd mask+0.05: 1(-1.395,0.975) 2(-1.395,0.325) 3(-1.395,-0.325) 4(-1.395,-0.975) 5(1.395,-0.975) 6(1.395,-0.325) 7(1.395,0.325) 8(1.395,0.975)
  rrect5% 1.65x2.4 smd paste-1.2 mask+0.05: 9(0,0)
  silkscreen extent -2.15,-1.7 1.7,1.75, body extent -1.65,-1.55 1.65,1.55, height 1
TP_SMD_2mm [mm]
  round 2 smd paste-2 mask+0.05: 1(0,0)
  body extent -1,-1 0.99,1, height 0.1
TSOT-23-5 [mm]
  rrect50% 0.6x1.2 smd mask+0.05: 1(-0.95,-1.3) 2(0,-1.3) 3(0.95,-1.3) 4(0.95,1.3) 5(-0.95,1.3)
  silkscreen extent -1.59,-0.88 1.59,0.85, body extent -1.45,-1.6 1.45,1.6, height 0.94
W1359-04PATXI0R_DBG [mm] "4-pin 1.25mm pitch SMD connector"
  rrect50% 0.95x1.2 hole 0.6 paste-2539.97 mask+0.05: 1(-1.875,0.825)
  rrect15% 0.8x1.3 smd paste+0 mask+0.05: 1(-1.875,2.375) 2(-0.625,2.375) 3(0.625,2.375) 4(1.875,2.375)
  oval 0.95x1.2 hole 0.6 paste-2539.97 mask+0.05: 2(-0.625,0.825) 3(0.625,0.825) 4(1.875,0.825)
  rrect15% 2.1x3 smd paste+0 mask+0.05: MP(-4.425,-0.375) MP(4.425,-0.375)
  body extent -5.08,-1.59 5.07,2.61, height 4.77

## Part data
C1 C2: library part CC1206KKX7RDBB102, "1nF 2000V X7R ±10% 1206 Ceramic Capacitor RoHS", Dielectric Type=X7R, Manufacturer=Yageo, Package=1206, Supplier Part Number 1=311-1487-2-ND, Temperature Range="-55°C ~ 125°C", Tolerance=±10%, Voltage=2000V, Component Type=SMD, ComponentLink1Description=Datasheet, ComponentLink1URL=https://www.yageo.com/upload/media/product/products/datasheet/mlcc/UPY-NP0X7R_HV_1KV-to-3KV_11.pdf, Part Number=CC1206KKX7RDBB102, Part Type="Ceramic / X7R / 1206", Replacement=NONE, Supplier 1=Digi-Key
C3 C5 C6 C16 C19 C20 C22 C25 C27 C28_RS-4851 C28_RS-4852 C28_RS-4853 C29 C30 C31 C33 C36: library part CL05A104KA5NNNC, "100nF 25V X5R ±10% 0402 Ceramic Capacitor RoHS", Dielectric Type=X5R, Manufacturer="Samsung Electro-Mechanics", Package=0402, Supplier Part Number 1=187-CL05A104KA5NNNC, Temperature Range="-55°C ~ 85°C", Tolerance=±10%, Voltage=25V, Component Status=Released, Component Type=SMD, ComponentLink1Description=Datasheet, ComponentLink1URL=https://eu.mouser.com/datasheet/2/585/MLCC-1837944.pdf, Part Number=CL05A104KA5NNNC, Part Type="Ceramic / X5R / 0402", Price=0.0013, Replacement=NONE, Standard Lead Time="38 Weeks", Supplier 1=Mouser
  C5 C6 C29 C30: Ajax_1C_ID=27170, Ajax_1C_PN="100nF 25V X5R 10% 0402 CL05A104KA5NNNC Ceramic Capacitor SMD RoHS", Ajax_1С_Status="Mass Production", GUID_1C=6c9121f0-7733-11eb-ab70-0050569f2651
C4 C7: library part GRM155R61E105KA12D, "1uF 25V Х5R ±10% 0402 Ceramic Capacitor RoHS", Dielectric Type=X5R, Manufacturer="Murata Electronics", Package=0402, Supplier Part Number 1=490-10017-1-ND, Temperature Range="-55°C ~ 85°C", Tolerance=±10%, Voltage=25V, Component Status=Released, Component Type=SMD, ComponentLink1Description=Datasheet, ComponentLink1URL=https://search.murata.co.jp/Ceramy/image/img/A01X/G101/ENG/GRM155R61E105KA12-01.pdf, Part Number=GRM155R61E105KA12D, Part Type="Ceramic / X5R / 0402", Price=0.0033, Replacement=NONE, Standard Lead Time="15 Weeks", Supplier 1=Digi-Key
  C7: Ajax_1C_ID=20895, Ajax_1C_PN="1uF 25V Х5R 10% 0402 GRM155R61E105KA12D Murata Ceramic Capacitor SMD RoHS", Ajax_1С_Status="Mass Production", GUID_1C=a74143f5-b173-11ea-ab61-0050569f2651
C8: library part CL10B104KB8NNNC, "100nF 50V X7R ±10% 0603 Ceramic Capacitor RoHS", Dielectric Type=X7R, Manufacturer="Samsung Electro-Mechanics", Package=0603, Supplier Part Number 1=1276-1000-2-ND, Temperature Range="-55°C ~ 125°C", Tolerance=±10%, Voltage=50V, Component Status=Released, Component Type=SMD, ComponentLink1Description=Datasheet, ComponentLink1URL=https://media.digikey.com/pdf/Data%20Sheets/Samsung%20PDFs/CL_Series_MLCC_ds.pdf, Part Number=CL10B104KB8NNNC, Part Type="Ceramic / X7R / 0603", Price=0.00273, Replacement=CL10B104KB8NNND, Standard Lead Time="18 Weeks", Supplier 1=Digi-Key
C9 C10 C11: library part GRM319R6YA106KA12D, "10uF 35V X5R ±10% 1206 Ceramic Capacitor RoHS", Dielectric Type=X5R, Manufacturer="Murata Electronics", Package=1206, Supplier Part Number 1=490-9964-1-ND, Temperature Range="-55°C ~ 85°C", Tolerance=±10%, Voltage=35V, Component Status=Released, Component Type=SMD, ComponentLink1Description=Datasheet, ComponentLink1URL=https://search.murata.co.jp/Ceramy/image/img/A01X/G101/ENG/GRM319R6YA106KA12-01.pdf, Part Number=GRM319R6YA106KA12D, Part Type="Ceramic / X5R / 1206", Price=0.03648, Replacement=NONE, Standard Lead Time=NONE, Supplier 1=Digi-Key
C12 C13: library part CL31A107MQHNNNE, "100uF 6.3V X5R ±20% 1206 Ceramic Capacitor RoHS", Dielectric Type=X5R, Manufacturer="Samsung Electro-Mechanics", Package=1206, Supplier Part Number 1=1276-1782-2-ND, Temperature Range="-55°C ~ 85°C", Tolerance=±20%, Voltage=6.3V, Component Status=Released, Component Type=SMD, ComponentLink1Description=Datasheet, ComponentLink1URL=https://media.digikey.com/pdf/Data%20Sheets/Samsung%20PDFs/CL_Series_MLCC_ds.pdf, Part Number=CL31A107MQHNNNE, Part Type="Ceramic / X5R / 1206", Price=0,05600243, Replacement=NONE, Standard Lead Time="22 Weeks", Supplier 1=Digi-Key
C14: library part GRM1885C1H152JA01D, "1.5nF 50V C0G(NP0) ±5% 0603 Ceramic Capacitor RoHS", Dielectric Type=C0G/NP0, Manufacturer="Murata Electronics", Package=0603, Supplier Part Number 1=81-GRM1885C1H152JA01, Temperature Range="-55°C ~ 125°C", Tolerance=±5%, Voltage=50V, Component Status=Released, Component Type=SMD, ComponentLink1Description=Datasheet, ComponentLink1URL=https://eu.mouser.com/datasheet/2/281/1/GRM1885C1H152JA01_01A-1984714.pdf, Part Number=GRM1885C1H152JA01D, Part Type="Ceramic / C0G(NP0) / 0603", Price=0.00446, Replacement=NONE, Standard Lead Time="22 Weeks", Supplier 1=Mouser
C15: library part CL05C100JB5NNNC, "10pF 50V C0G ±5% 0402 Ceramic Capacitor RoHS", Dielectric Type=C0G/NP0, Manufacturer="Samsung Electro-Mechanics", Package=0402, Supplier Part Number 1=1276-1139-2-ND, Temperature Range="-55°C ~ 125°C", Tolerance=±5%, Voltage=50V, Component Status=Released, Component Type=SMD, ComponentLink1Description=Datasheet, ComponentLink1URL=https://media.digikey.com/pdf/Data%20Sheets/Samsung%20PDFs/CL_Series_MLCC_ds.pdf, Part Number=CL05C100JB5NNNC, Part Type="Ceramic / C0G(NP0) / 0402", Price=0.00145, Replacement=NONE, Standard Lead Time="28 Weeks", Supplier 1=Digi-Key
C17 C18 C21 C23 C26 C32 C34: library part GRM155C80J106ME11D, "10uF 6.3V X6S ±20% 0402 Ceramic Capacitor RoHS", Dielectric Type=X6S, Manufacturer="Murata Electronics", Package=0402, Supplier Part Number 1=490-13233-1-ND, Temperature Range="-55°C ~ 105°C", Tolerance=±20%, Voltage=6.3V, Component Status=Released, Component Type=SMD, ComponentLink1Description=Datasheet, ComponentLink1URL=https://search.murata.co.jp/Ceramy/image/img/A01X/G101/ENG/GRM155C80J106ME11-01.pdf, Part Number=GRM155C80J106ME11D, Part Type="Ceramic / X6S / 0402", Price=0.01104, Replacement=NONE, Standard Lead Time="15 Weeks", Supplier 1=Digi-Key
C24: library part GRM155R60J475ME47, "4.7uF 6.3V X5R ±20% 0402 Ceramic Capacitor RoHS", Dielectric Type=X5R, Manufacturer="Murata Electronics", Package=0402, Supplier Part Number 1=490-5915-2-ND, Temperature Range="-55°C ~ 85°C", Tolerance=±20%, Voltage=6.3V, Component Status=Released, Component Type=SMD, ComponentLink1Description=Datasheet, ComponentLink1URL=https://search.murata.co.jp/Ceramy/image/img/A01X/G101/ENG/GRM155R60J475ME47-01.pdf, Part Number=GRM155R60J475ME47, Part Type="Ceramic / X5R / 0402", Price=0.013, Replacement=CC0402MRX5R5BB475, Standard Lead Time="15 Weeks", Supplier 1=Digi-Key
C35: library part CL05B103KA5NNNC, "10nF 25V X7R ±10% 0402 Ceramic Capacitor RoHS", Dielectric Type=X7R, Manufacturer="Samsung Electro-Mechanics", Package=0402, Supplier Part Number 1=187-CL05B103KA5NNNC, Temperature Range="-55°C ~ 125°C", Tolerance=±10%, Voltage=25V, Component Status=Released, Component Type=SMD, ComponentLink1Description=Datasheet, ComponentLink1URL=https://eu.mouser.com/datasheet/2/585/MLCC-1837944.pdf, Part Number=CL05B103KA5NNNC, Part Type="Ceramic / X7R / 0402", Price=0.00145, Replacement=NONE, Standard Lead Time="28 Weeks", Supplier 1=Mouser
D1: "Fixed 3.3V, 150mA Output, 12V max Input, 4uA Iq, LDO, TSOT-23-5", Manufacturer=Onsemi, Package=TSOT-23-5, Supplier Part Number 1=863-NCV551SN33T1G, Temperature Range="-40°C ~ 125°C", Component Status=Released, Component Type=SMD, ComponentLink1Description=Datasheet, ComponentLink1URL=https://eu.mouser.com/datasheet/2/308/NCP551_D-1812664.pdf, Part Number=NCV551SN33T1G, Part Type="Power / Linear Regulator", Price=0.23211881, Replacement=NONE, Standard Lead Time="53 Weeks", Supplier 1=Mouser
D2: "I2C Digital Isolator 2500Vrms 2 Channel 1Mbps 25kV/us, SOIC-8", Manufacturer="Texas Instruments", Package=SOIC-8, Supplier Part Number 1=296-34871-2-ND, Temperature Range="-40°C ~ 125°C", Component Type=SMD, ComponentLink1Description=Datasheet, ComponentLink1URL=https://www.ti.com/lit/ds/symlink/iso1540.pdf, Part Number=ISO1540DR, Part Type=Isolator, Price=1,4064, Replacement=ADUM1250ARZ, Standard Lead Time="8 Weeks", Supplier 1=Digi-Key
DD1: "60V Input, 3.5A, Step-Down DC/DC Converter With Eco-Mode, SOIC-8 EP", Manufacturer="Texas Instruments", Package=SOIC-8, Supplier Part Number 1=296-TPS54360BDDARTR-ND, Temperature Range="-40°C ~ 150°C", Component Status=Released, Component Type=SMD, ComponentLink1Description=Datasheet, ComponentLink1URL=https://www.ti.com/lit/ds/symlink/tps54360b.pdf, Part Number=TPS54360BDDAR, Part Type="Power / DC-DC / Buck", Price=5,11, Replacement=NONE, Standard Lead Time="16 Weeks", Supplier 1=Digi-Key
DD2_RS-4851 DD2_RS-4852 DD2_RS-4853: "3.3V 1/1 Transceiver Half RS422 Up to 250 kbps, RS485 With IEC ESD protection, SON-8", Manufacturer="Texas Instruments", Package=VDFN-8, Supplier Part Number 1=296-40520-2-ND, Temperature Range="-40°C ~ 125°C", Component Status=Released, Component Type=SMD, ComponentLink1Description=Datasheet, ComponentLink1URL=https://www.ti.com/lit/ds/symlink/sn65hvd72.pdf, Part Number=SN65HVD72DRBR, Part Type="Transceivers / RS-232/RS-422/RS-485", Price=0.709, Replacement=NONE, Standard Lead Time="16 Weeks", Supplier 1=Digi-Key
FB1: "1 kOhms @ 100MHz Ferrite Bead 0402, 350mA 490mOhm", Current=0.35A, Manufacturer="Murata Electronics", Package=0402, Saturation Current=NONE, Supplier Part Number 1=490-5442-2-ND, Temperature Range="-55°C ~ 125°C", Tolerance=±25%, Component Status=Released, Component Type=SMD, ComponentLink1Description=Datasheet, ComponentLink1URL=https://www.murata.com/en-us/products/productdata/8796740059166/ENFA0018.pdf, Part Number=BLM15AX102SN1D, Part Type="Ferrite Bead", Price=0.00265, Replacement=NONE, Standard Lead Time="7 Weeks", Supplier 1=Digi-Key
FP1 FP2 FP3 FP4 FP5 FP6 FP7 FP8: "1.1mm Pad for Plug-In or Receptacle", Manufacturer=NONE, Component Status=Released, Component Type=PTH, ComponentLink1Description=Datasheet, ComponentLink1URL=NONE, Part Number=PAD-1.1mm, Part Type=Pad, Price=NONE, Replacement=NONE, Temperature Range=NONE
K1_CellSelectModule1 K1_CellSelectModule2 K1_CellSelectModule3 K1_CellSelectModule4 K1_CellSelectModule5 K1_CellSelectModule6 K1_CellSelectModule7 K1_CellSelectModule8 K1_CellSelectModule9 K1_CellSelectModule10 K1_CellSelectModule11 K1_CellSelectModule12 K1_CellSelectModule13 K1_CellSelectModule14: library part CMP-00287-00695349-1, "AQY280SX AQY Photomos Series 120 mA 350 V 25 Ohm SMT 1 Channel Solid State Relay -SOP-4", Case/Package=SOP, Forward Current=50mA, Isolation Voltage=1.5kV, Load Current=120mA, Max Operating Temperature=85°C, Max Output Voltage=350V, Min Operating Temperature=-40°C, Resistance=25Ω, Height=2.1mm, Input Current=50mA, Lead Free="Lead Free", Length=4.4mm, Max Input Current=50mA, Max Output Current=120mA, Mount="Surface Mount", NexarPartId=695349, Number of Pins=4, Output Current=120mA, Output Voltage=350V, Radiation Hardening=No, Relay Type=Relay, RoHS=Compliant, Termination="Gull Wing", Throw Configuration="DPST, SPST", Width=4.3mm
L1: library part SRP7028A-330M, "33uH Shielded Wirewound Power Inductor 2.5A 240mOhm Max", Current=2.5A, Manufacturer="Bourns Inc", Package=7.3x6.6x2.8mm, Supplier Part Number 1=652-SRP7028A-330M, Temperature Range="-40°C ~ 150°C", Tolerance=±20%, Component Status=Released, Component Type=SMD, ComponentLink1Description=Datasheet, ComponentLink1URL=https://eu.mouser.com/datasheet/2/54/srp7028a-1391359.pdf, Part Number=SRP7028A-330M, Part Type="Power / Ferrite Core", Price=0.807, Replacement=NONE, Saturation Current=2.5A, Standard Lead Time="24 Weeks", Supplier 1=Mouser
PB1 PB2: "Tactile Switch 2.5x3mm, SMD, 160gf, Height 1.7mm, 50mA 12VDC", Manufacturer=Connfly, Temperature Range="-20°C ~ 70°C", Component Type=SMD, Part Number=DS1042-24-2017VBR16005, Part Type="Switch / Tactile", Replacement=NONE
R1 R2: library part RC0402FR-07120RL, "120 Ohms ±1% 1/16W 0402 Thick Film Resistor", Manufacturer=Yageo, Package=0402, Power Rating=0.062W, Temperature Range="-55°C ~ 155°C", Temperature Stability=±100ppm/°C, Tolerance=±1%, Voltage=50V, Component Status=Released, Component Type=SMD, ComponentLink1Description=Datasheet, ComponentLink1URL=https://eu.mouser.com/datasheet/2/447/PYu_RC_Group_51_RoHS_L_10-1664068.pdf, Part Number=RC0402FR-07120RL, Part Type="Thick Film", Price=0.00065, Replacement=NONE
R3 R4: library part CHV1206-FX-1004ELF, "1 MOhms ±1%, 1/4W 1206 Thick Film Resistor", Manufacturer=Bourns, Package=1206, Power Rating=0.25W, Supplier Part Number 1=652-CHV1206FX1004ELF, Temperature Range="-55°C ~ 155°C", Temperature Stability=±100ppm/°C, Tolerance=±1%, Voltage=800V, Component Status=Released, Component Type=SMD, ComponentLink1Description=Datasheet, ComponentLink1URL=https://eu.mouser.com/datasheet/2/54/CHV-777595.pdf, Part Number=CHV1206-FX-1004ELF, Part Type="Thick Film", Price=0.0173216, Replacement=NONE, Supplier 1=Mouser
R5 R6 R25_CellSelectModule1 R25_CellSelectModule2 R25_CellSelectModule3 R25_CellSelectModule4 R25_CellSelectModule5 R25_CellSelectModule6 R25_CellSelectModule7 R25_CellSelectModule8 R25_CellSelectModule9 R25_CellSelectModule10 R25_CellSelectModule11 R25_CellSelectModule12 R25_CellSelectModule13 R25_CellSelectModule14: library part RC0402DR-071KL, "1 kOhms ±0.5% 1/16W 0402 Thick Film Resistor", Manufacturer=Yageo, Package=0402, Power Rating=0.062W, Supplier Part Number 1=13-RC0402DR-071KLTR-ND, Temperature Range="-55°C ~ 155°C", Temperature Stability=±100ppm/°C, Tolerance=±0.5%, Voltage=50V, Component Status=Released, Component Type=SMD, ComponentLink1Description=Datasheet, ComponentLink1URL=https://www.yageo.com/upload/media/product/productsearch/datasheet/rchip/PYu-RC_Group_51_RoHS_L_12.pdf, Part Number=RC0402DR-071KL, Part Type="Thick Film", Price=0.015, Replacement=NONE, Supplier 1=Digi-Key
R7: library part RC0402FR-0722KL, "22 kOhms ±1% 1/16W 0402 Thick Film Resistor", Manufacturer=Yageo, Package=0402, Power Rating=0.062W, Temperature Range="-55°C ~ 155°C", Temperature Stability=±100ppm/°C, Tolerance=±1%, Voltage=50V, Component Status=Released, Component Type=SMD, ComponentLink1Description=Datasheet, ComponentLink1URL=https://eu.mouser.com/datasheet/2/447/PYu_RC_Group_51_RoHS_L_10-1664068.pdf, Part Number=RC0402FR-0722KL, Part Type="Thick Film", Price=0,00065038, Replacement=NONE
R8 R11: library part RC0402FR-07160KL, "160 kOhms ±1% 1/16W 0402 Thick Film Resistor", Manufacturer=Yageo, Package=0402, Power Rating=0.062W, Temperature Range="-55°C ~ 155°C", Temperature Stability=±100ppm/°C, Tolerance=±1%, Voltage=50V, Component Status=Released, Component Type=SMD, ComponentLink1Description=Datasheet, ComponentLink1URL=https://eu.mouser.com/datasheet/2/447/PYu_RC_Group_51_RoHS_L_11-1984063.pdf, Part Number=RC0402FR-07160KL, Part Type="Thick Film", Price=0,0005, Replacement=NONE
R9: library part RC0402FR-0768KL, "68 kOhms ±1% 1/16W 0402 Thick Film Resistor", Manufacturer=Yageo, Package=0402, Power Rating=0.062W, Supplier Part Number 1=311-68.0KLRTR-ND, Temperature Range="-55°C ~ 155°C", Temperature Stability=±100ppm/°C, Tolerance=±1%, Voltage=50V, Component Status=Released, Component Type=SMD, ComponentLink1Description=Datasheet, ComponentLink1URL=https://eu.mouser.com/datasheet/2/447/PYu_RC_Group_51_RoHS_L_11-1984063.pdf, Part Number=RC0402FR-0768KL, Part Type="Thick Film", Price=0,00065051, Replacement=NONE, Supplier 1=Digi-Key
R10: library part RC0402FR-072K2L, "2.2 kOhms ±1% 1/16W 0402 Thick Film Resistor", Manufacturer=Yageo, Package=0402, Power Rating=0.062W, Temperature Range="-55°C ~ 155°C", Temperature Stability=±100ppm/°C, Tolerance=±1%, Voltage=50V, Component Status=Released, Component Type=SMD, ComponentLink1Description=Datasheet, ComponentLink1URL=https://eu.mouser.com/datasheet/2/447/PYu_RC_Group_51_RoHS_L_11-1984063.pdf, Part Number=RC0402FR-072K2L, Part Type="Thick Film", Price=0,00065, Replacement=NONE
R12: library part RC0402FR-0730KL, "30 kOhms ±1% 1/16W 0402 Thick Film Resistor", Manufacturer=Yageo, Package=0402, Power Rating=0.062W, Supplier Part Number 1=311-30.0KLRTR-ND, Temperature Range="-55°C ~ 155°C", Temperature Stability=±100ppm/°C, Tolerance=±1%, Voltage=50V, Component Status=Released, Component Type=SMD, ComponentLink1Description=Datasheet, ComponentLink1URL=https://eu.mouser.com/datasheet/2/447/PYu_RC_Group_51_RoHS_L_11-1984063.pdf, Part Number=RC0402FR-0730KL, Part Type="Thick Film", Price=0,00065, Replacement=NONE, Supplier 1=Digi-Key
R13 R14 R15 R16: library part RC0402FR-074K7L, "4.7 kOhms ±1% 1/16W 0402 Thick Film Resistor", Manufacturer=Yageo, Package=0402, Power Rating=0.062W, Temperature Range="-55°C ~ 155°C", Temperature Stability=±100ppm/°C, Tolerance=±1%, Voltage=50V, Component Status=Released, Component Type=SMD, ComponentLink1Description=Datasheet, ComponentLink1URL=https://eu.mouser.com/datasheet/2/447/PYu_RC_Group_51_RoHS_L_10-1664068.pdf, Part Number=RC0402FR-074K7L, Part Type="Thick Film", Price=0.00065, Replacement=NONE
R17 R18: library part RC0402JR-07100KL, "100 kOhms ±5% 1/16W 0402 Thick Film Resistor", Manufacturer=Yageo, Package=0402, Power Rating=0.062W, Supplier Part Number 1=311-100KJRTR-ND, Temperature Range="-55°C ~ 155°C", Temperature Stability=±100ppm/°C, Tolerance=±5%, Voltage=50V, Component Status=Released, Component Type=SMD, ComponentLink1Description=Datasheet, ComponentLink1URL=https://eu.mouser.com/datasheet/2/447/PYu_RC_Group_51_RoHS_L_10-1664068.pdf, Part Number=RC0402JR-07100KL, Part Type="Thick Film", Price=0.00054, Replacement=NONE, Supplier 1=Digi-Key
R19_RS-4851 R19_RS-4852 R19_RS-4853 R20_RS-4851 R20_RS-4852 R20_RS-4853 R22_RS-4851 R22_RS-4852 R22_RS-4853 R24_RS-4851 R24_RS-4852 R24_RS-4853 R27 R31: library part RC0402FR-0710KL, "10 kOhms ±1% 1/16W 0402 Thick Film Resistor", Manufacturer=Yageo, Package=0402, Power Rating=0.062W, Supplier Part Number 1=311-10.0KLRTR-ND, Temperature Range="-55°C ~ 155°C", Temperature Stability=±100ppm/°C, Tolerance=±1%, Voltage=50V, Component Status=Released, Component Type=SMD, ComponentLink1Description=Datasheet, ComponentLink1URL=https://eu.mouser.com/datasheet/2/447/PYu_RC_Group_51_RoHS_L_10-1664068.pdf, Part Number=RC0402FR-0710KL, Part Type="Thick Film", Price=0,00065, Replacement=NONE, Supplier 1=Digi-Key